# Altium PCB PCB1.PcbDoc
Units mm, origin at the board's own origin, x right, y up, seen from the top; angles counter-clockwise.
Board outline 152.4 x 101.6 mm, 2 copper layers (Top Layer, Bottom Layer), stack 1 mm thick; 16 components, 10 nets, 60 pads, 0 vias.
Unrouted connection lines stored in the file: 36.
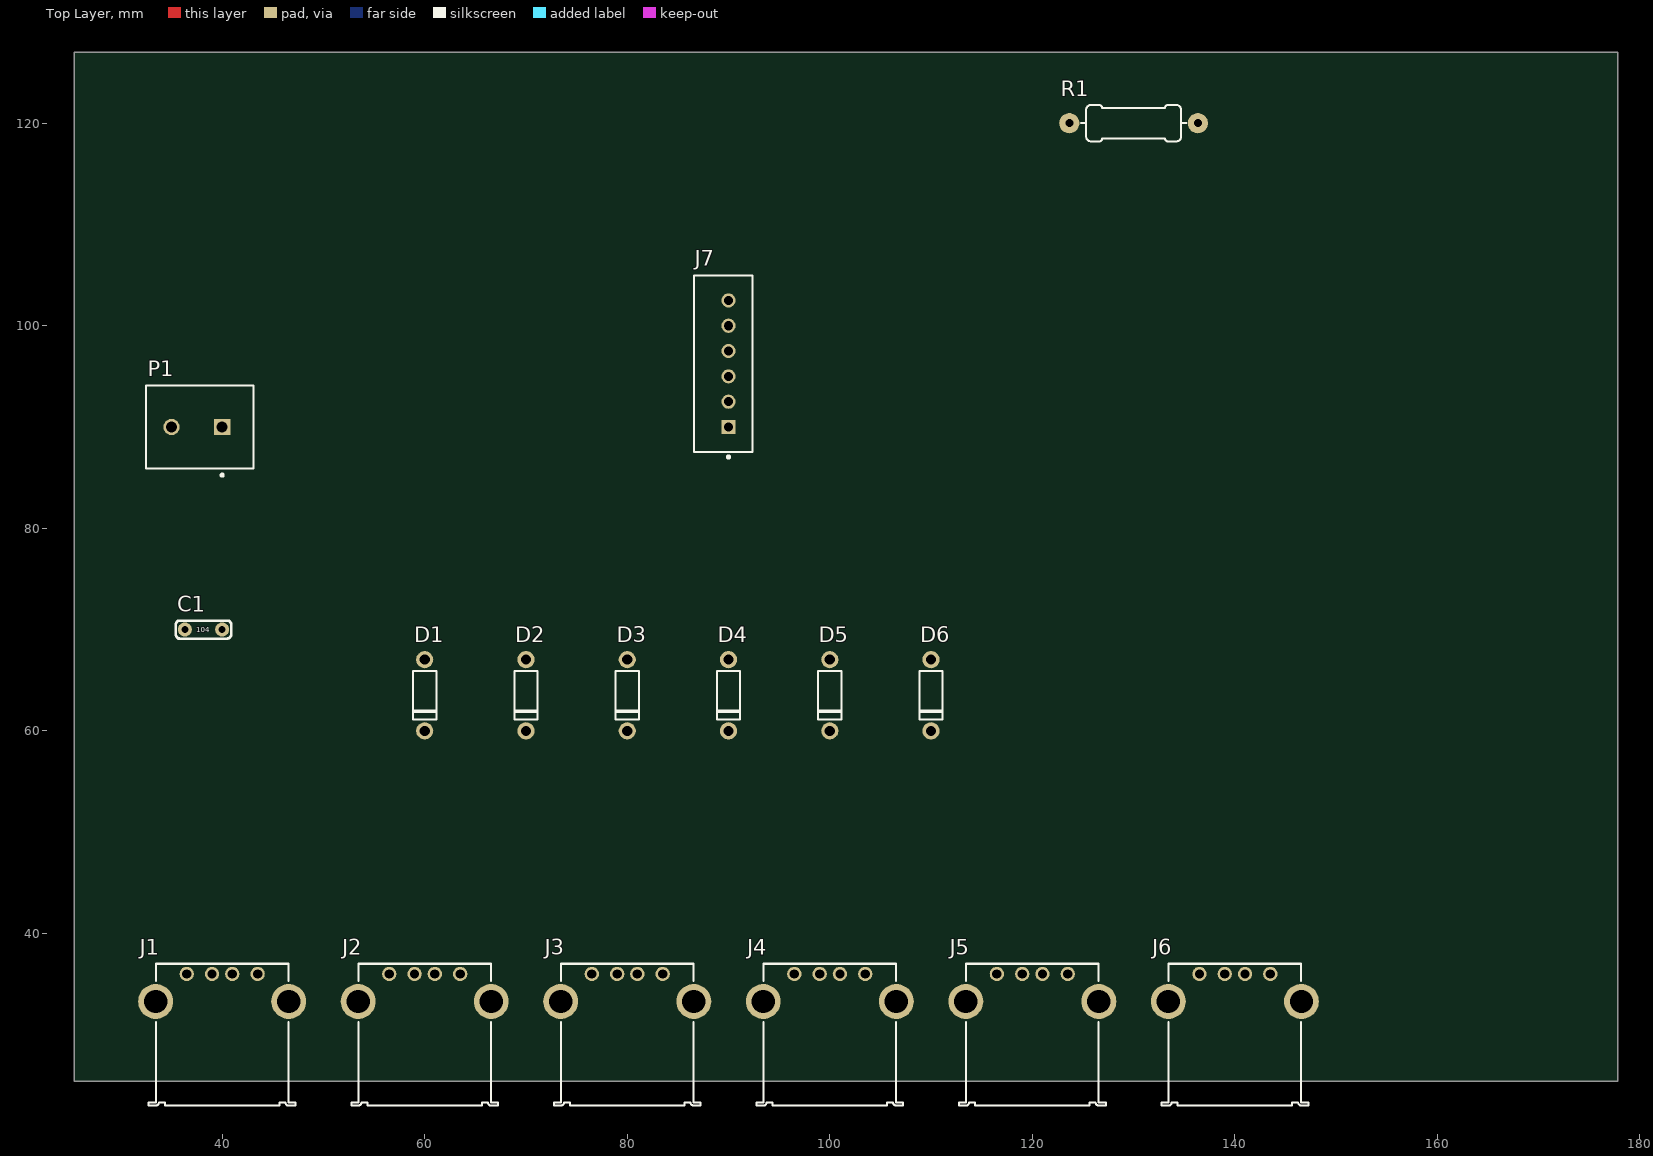
[diagram p0: Top Layer view]
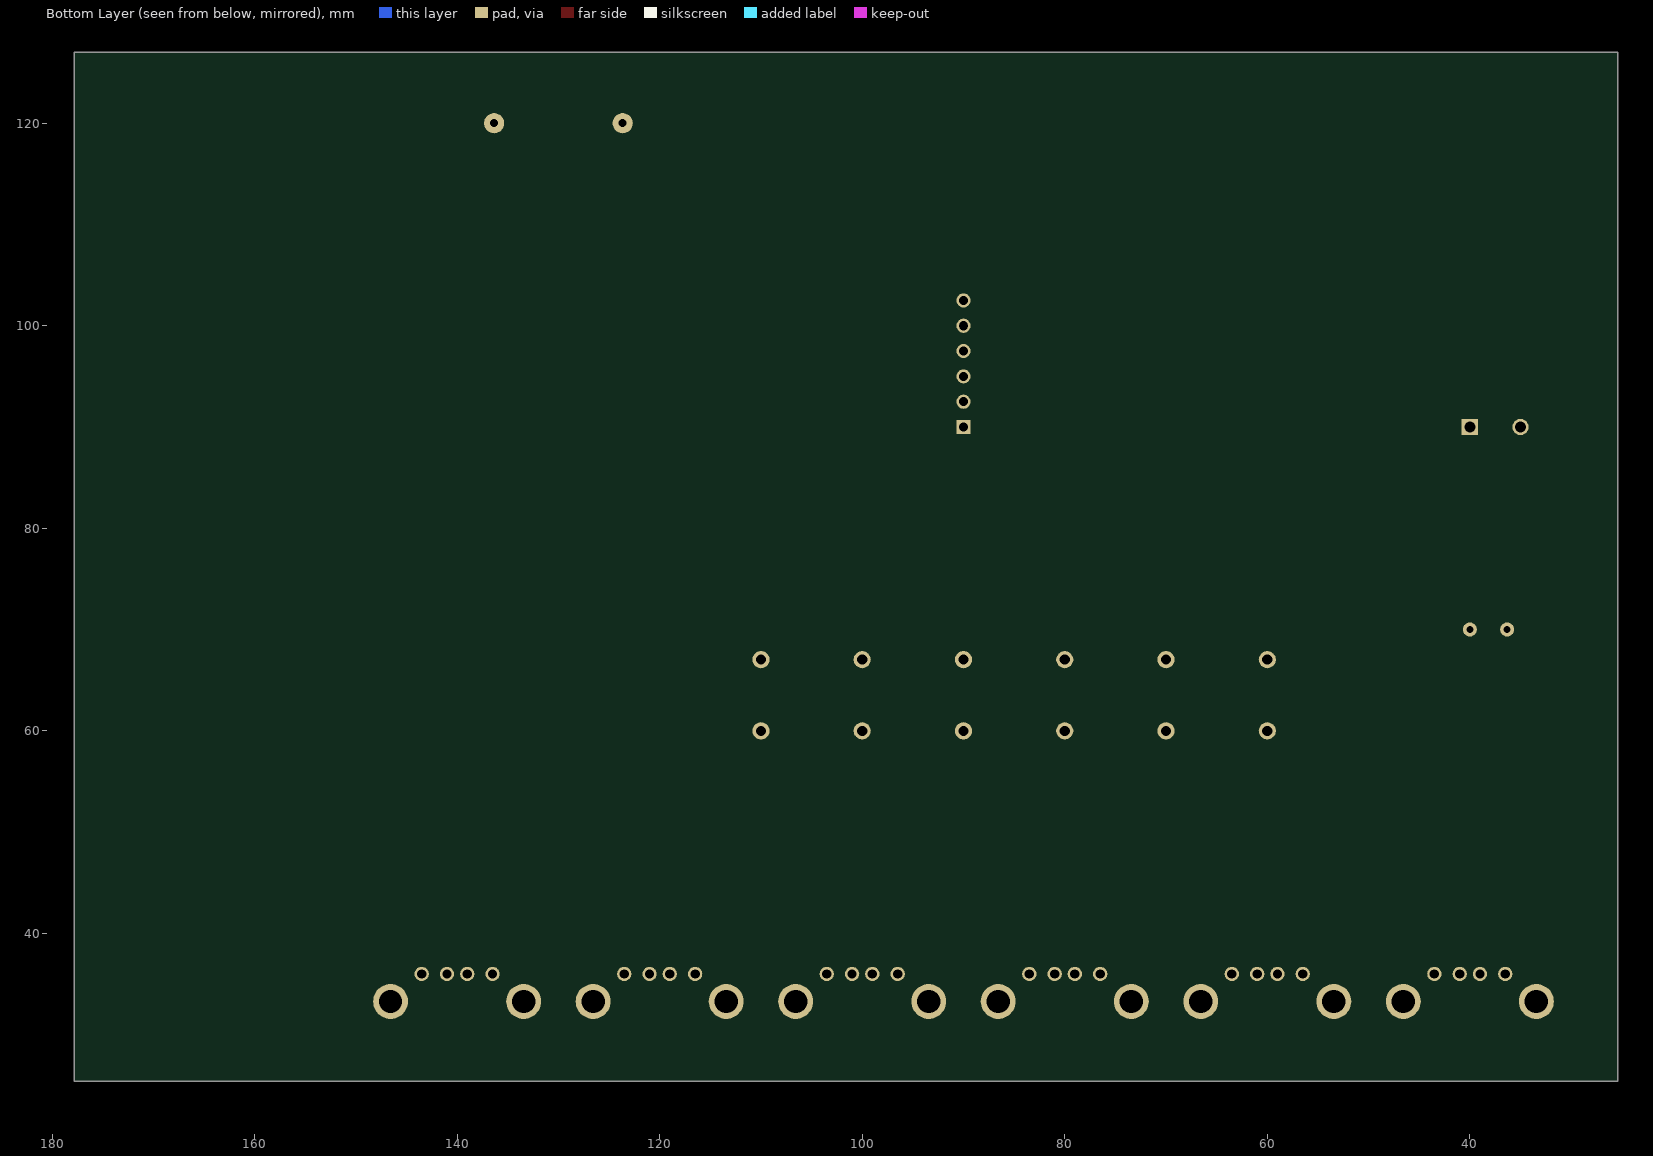
[diagram p1: Bottom Layer view, seen from below]

## Layer stack, top to bottom
Top Solder: solder mask 0.05, Solder Resist, Dk 3.5
Top Layer: signal copper 0.1
Dielectric 1: dielectric 0.8, FR-4, Dk 4.8
Bottom Layer: signal copper 0.1
Bottom Solder: solder mask 0.05, Solder Resist, Dk 3.5

## Board outline
25.4,25.4 177.8,25.4 177.8,127 25.4,127

## Design rules (kind name [scope] priority, off if disabled: settings)
Clearance [All] p1: gap=0.25 ignorepadtopadclearanceinfootprint=FALSE
PolygonConnect [All] p1: connectstyle=Relief reliefconductorwidth=0.254 reliefentries=4 polygonreliefangle="90 Angle" airgapwidth=0.254
RoutingVias [All] p1: holewidth=0.4 width=0.5 viastyle="Through Hole" minholewidth=0.4 minwidth=0.5 maxholewidth=0.4 maxwidth=0.5
SolderMaskExpansion [All] p1: expansion=0.102 istentingtop=FALSE
Width Width_POW [(InNet('NetJ1_2') OR InNet('NetJ1_2'))] p1: maxlimit=0.3 minlimit=0.2 preferedwidth=0.3
Width [All] p2: maxlimit=0.2 minlimit=0.1 preferedwidth=0.2
30 further rules are at their usual default settings.

## Components (designator, comment, footprint, x,y, rotation, side; value= is the part's Value field where it differs from the comment)
C1 "Cap" "CAP 104" 35.555,70 r0 top value=100pF
D1 "Diode" "DIODE 4007" 60,65.8 r270 top
D2 "Diode" "DIODE 4007" 70,65.8 r270 top
D3 "Diode" "DIODE 4007" 80,65.8 r270 top
D4 "Diode" "DIODE 4007" 90,65.8 r270 top
D5 "Diode" "DIODE 4007" 100,65.8 r270 top
D6 "Diode" "DIODE 4007" 110,65.8 r270 top
J1 "61400416021" 61400416021 40,30 r0 top
J2 "61400416021" 61400416021 60,30 r0 top
J3 "61400416021" 61400416021 80,30 r0 top
J4 "61400416021" 61400416021 100,30 r0 top
J5 "61400416021" 61400416021 120,30 r0 top
J6 "61400416021" 61400416021 140,30 r0 top
J7 "B6B-XH-A(LF)(SN)" FP-B6B-XH-A_LF_SN-MFG 89.475,96.25 r90 top
P1 "282836-2" TECO-282836-2_V 37.5,90 r180 top
R1 "Resistor" "Res 1/2WatT" 130,120 r0 top value=10K

## Footprints (in the part's own frame and the unit in brackets; to place one, negate y for a bottom-side part, rotate by r counter-clockwise, add the part's x,y. Pads: shape width x height; smd on the part's side, far side on the other; paste and mask are expansions set on the pad)
61400416021 [mm] "USB 2.0 Type A Horizontal"
  round 1.42 hole 0.92: 1(-3.5,5.99) 2(-1,5.99) 3(1,5.99) 4(3.5,5.99)
  round 3.45 hole 2.3: Shell(-6.57,3.28) Shell(6.57,3.28)
  silkscreen extent -7.25,-7 7.25,7, body extent -8,-7 8,7, height 7.63
"CAP 104" [mm] "Capasitor Troughole"
  round 1.4 hole 0.7: 1(0.762,0) 2(4.445,0)
  silkscreen extent -0.13,-0.89 5.33,0.89, body extent 0.08,-1 5,1, height 6.46
"DIODE 4007" [mm] "DIODE 4002"
  round 1.7 hole 1: 1(-1.225,0) 2(5.8,0)
  silkscreen extent -0.13,-1.14 4.7,1.14, body extent -1.61,-1.31 6.19,1.31, height 2.62
FP-B6B-XH-A_LF_SN-MFG [mm]
  rect 1.4x1.4 hole 0.9 paste-1000 mask+0: 1(-6.25,-0.525)
  round 1.4 hole 0.9 paste-1000 mask+0: 2(-3.75,-0.525) 3(-1.25,-0.525) 4(1.25,-0.525) 5(3.75,-0.525) 6(6.25,-0.525)
  silkscreen extent -9.35,-2.88 8.7,2.88, body extent -8.8,-2.98 8.8,2.98, height 0.25
"Res 1/2WatT" [mm]
  round 2 hole 0.8: 1(-6.35,0) 2(6.35,0)
  silkscreen extent -5.2,-1.8 5.2,1.8, body extent -6.72,-1.88 6.73,1.87, height 3.78
TECO-282836-2_V [mm] "Female Header, Pitch 5mm, 1 x 2 Position, Height 10mm"
  rect 1.6x1.6 hole 1.1: 1(-2.5,0)
  round 1.6 hole 1.1: 2(2.5,0)
  silkscreen extent -5.6,-4.1 5,4.87, body extent -5.6,-4.1 5,4.1, height 10

## Part data
C1: "Capacitor", LatestRevisionDate=17-Jul-2002, LatestRevisionNote="Re-released for DXP Platform.", PackageDescription="Radial Cap, Thru-Hole; 2 Leads; 0.3 in Pin Spacing", PackageReference=RAD-0.3, Published=8-Jun-2000, Publisher="Altium Limited"
D1 D2 D3 D4 D5 D6: "Default Diode", Code_JEDEC=DO-214-AB, LatestRevisionDate=17-Jul-2002, LatestRevisionNote="Re-released for DXP Platform.", PackageDescription="DO-214-AB/SMC; 2 C-Bend Leads; Body 7.9 x 5.9 mm, inc. leads (LxW)", PackageReference=SMC, PackageVersion=Sep-1996, Published=8-Jun-2000, Publisher="Altium Limited"
J1 J2 J3 J4 J5 J6: library part CMP-1502-03227-1, "USB 2.0 Type A Receptacle WR-COM, Horizontal, THT", Contact Resistance=20mOhm, Manufacturer="Wurth Elektronik", Operating Temperature=-40to105degC, Rated Current=1.5A, Working Voltage=30VAC, Connector Type=USB2.0TypeA, Datasheet URL=https://katalog.we-online.de/em/datasheet/61400416021.pdf, Gender=Receptacle, Manufacturer URL=http://www.we-online.de, Mounting Technology=THT, Orientation=Horizontal, Package Reference=61400416021, Packaging=Tray, Part Number=61400416021, Publisher=WurthElektronik
J7: library part CMP-17439-000076-1, "CONN HEADER VERT 6POS 2.5MM"
P1: library part CMP-1684-00017-1, "Female Header, Pitch 5 mm, 1 x 2 Position, Height 10 mm, Tail Length 3.5 mm, Rohs, Bulk", Color=Green, Current=13.5A, Manufacturer="TE Connectivity", Package Description="Female Header, Pitch 5 mm, 1 x 2 Position, Height 10 mm, Tail Length 3.5 mm", Package Reference=THD, Standard Package=300, Voltage=300V, 3D Model=282836-2.pdf, Category=Connectors,Interconnects, Clamp Material - Plating=Brass-NickelPlated, Contact Material - Plating=Brass-TinPlated, Datasheet URL=http://www.te.com.cn/commerce/DocumentDelivery/DDEController?Action=showdoc&DocId=Catalog+Section%7F1308389_EUROSTYLE_TERMINAL_BLOCKS%7F0607%7Fpdf%7FEnglish%7FENG_CS_1308389_EUROSTYLE_TERMINAL_BLOCKS_0607.pdf%7F282836-2, Dynamic Catalog=BuchananSeries, Family=TerminalBlocks-WiretoBoard, Featured Product=EurostyleTerminalBlockConnectors, Features=Interlocking(Side), Housing Material=Polyamide(PA66),Nylon6/6, Manufacturer URL=http://www.te.com, Mating Orientation=HorizontalwithBoard, Mounting Type=ThroughHole, Number of Levels=1, Other Names="5ULV-02B / A98076", Packaging=Bulk, Pitch="0.197\"(5.00mm)", Positions Per Level=2, Product Training Modules=Wire-to-BoardEurostyleTerminalBlocks, RoHS Information=282836-2StatementofCompliance, Screw Material - Plating=Brass-NickelPlated, Screw Thread=M3, Series=Buchanan, Torque - Screw=0.68Nm(6Lb-In), Wire Gauge=16-30AWG, Wire Termination=Screw-RisingCageClamp
R1: LatestRevisionDate=17-Jul-2002, LatestRevisionNote="Re-released for DXP Platform.", PackageDescription="Axial Device, Thru-Hole; 2 Leads; 0.3 in Pin Spacing", PackageReference=AXIAL-0.3, Published=8-Jun-2000, Publisher="Altium Limited"

## Nets (pads, with @x,y where several pads share a name; then routed paths per layer and width w, separated by ;. In a path a pad name is that pad's centre, name@x,y a point inside that pad or via, vN(x,y) a via of type N, cw(c..) or ccw(c..) an arc to the next point about the centre after c; other vN are vias at no path point)
NetC1_1: C1.1 J1.1 J2.1 J3.1 J4.1 J5.1 J6.1 J7.4 P1.2 R1.1
NetC1_2: C1.2 J1.4 J2.4 J3.4 J4.4 J5.4 J6.4 J7.3 P1.1
NetD1_1: D1.1 D2.1 D3.1 D4.1 D5.1 D6.1 J7.2 R1.2
NetD1_2: D1.2 J1.3
NetD2_2: D2.2 J2.3
NetD3_2: D3.2 J3.3
NetD4_2: D4.2 J4.3
NetD5_2: D5.2 J5.3
NetD6_2: D6.2 J6.3
NetJ1_2: J1.2 J2.2 J3.2 J4.2 J5.2 J6.2 J7.1
pads on no net: J1.Shell J2.Shell J3.Shell J4.Shell J5.Shell J6.Shell J7.5 J7.6

## Text inside footprints (layer, text, board x,y; h text height)
C1: Top Overlay "104" at 37.46,69.746 h0.5
J1: Mechanical 2 "PCB Edge" at 37.8,21.78 h0.81
J2: Mechanical 2 "PCB Edge" at 57.8,21.78 h0.81
J3: Mechanical 2 "PCB Edge" at 77.8,21.78 h0.81
J4: Mechanical 2 "PCB Edge" at 97.8,21.78 h0.81
J5: Mechanical 2 "PCB Edge" at 117.8,21.78 h0.81
J6: Mechanical 2 "PCB Edge" at 137.8,21.78 h0.81